# Altium PCB SingleSupplyAudioAmp.PcbDoc
Units mm, origin at the board's own origin, x right, y up, seen from the top; angles counter-clockwise.
Board outline 40 x 60 mm, 2 copper layers (Top Layer, Bottom Layer); 81 components, 45 nets, 222 pads, 418 vias.
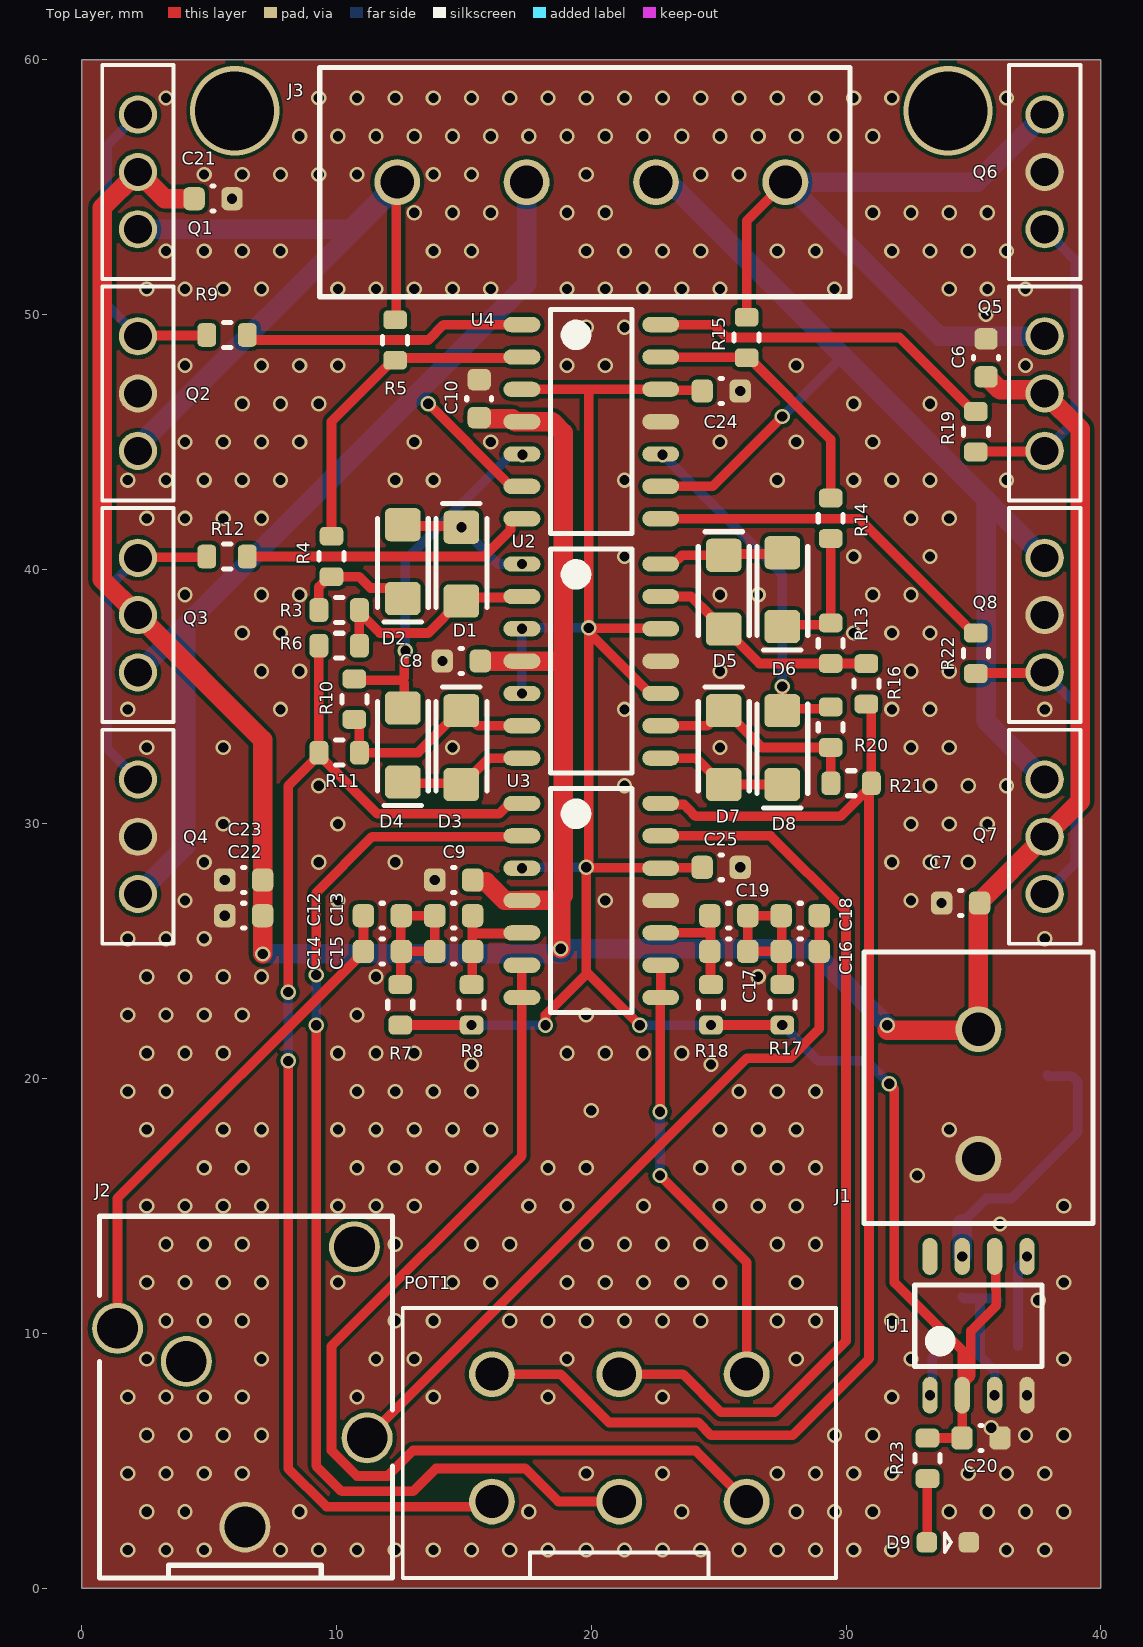
[diagram p0: Top Layer view]
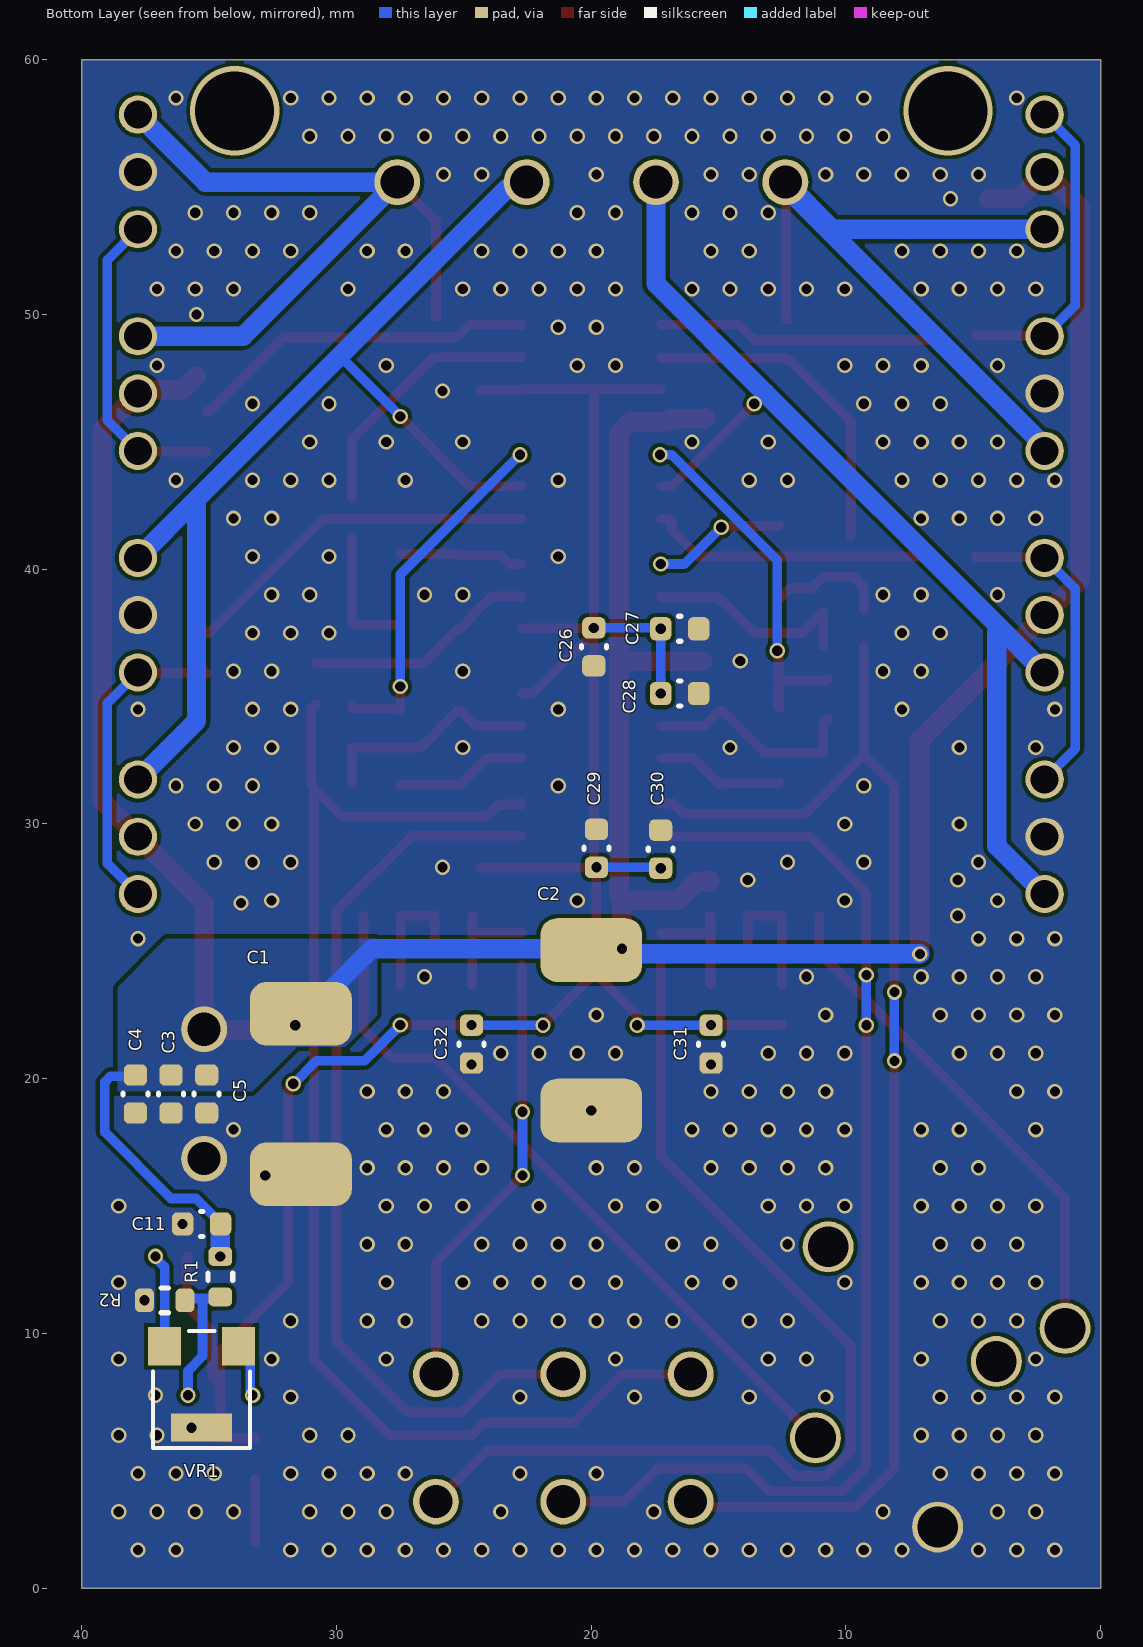
[diagram p1: Bottom Layer view, seen from below]
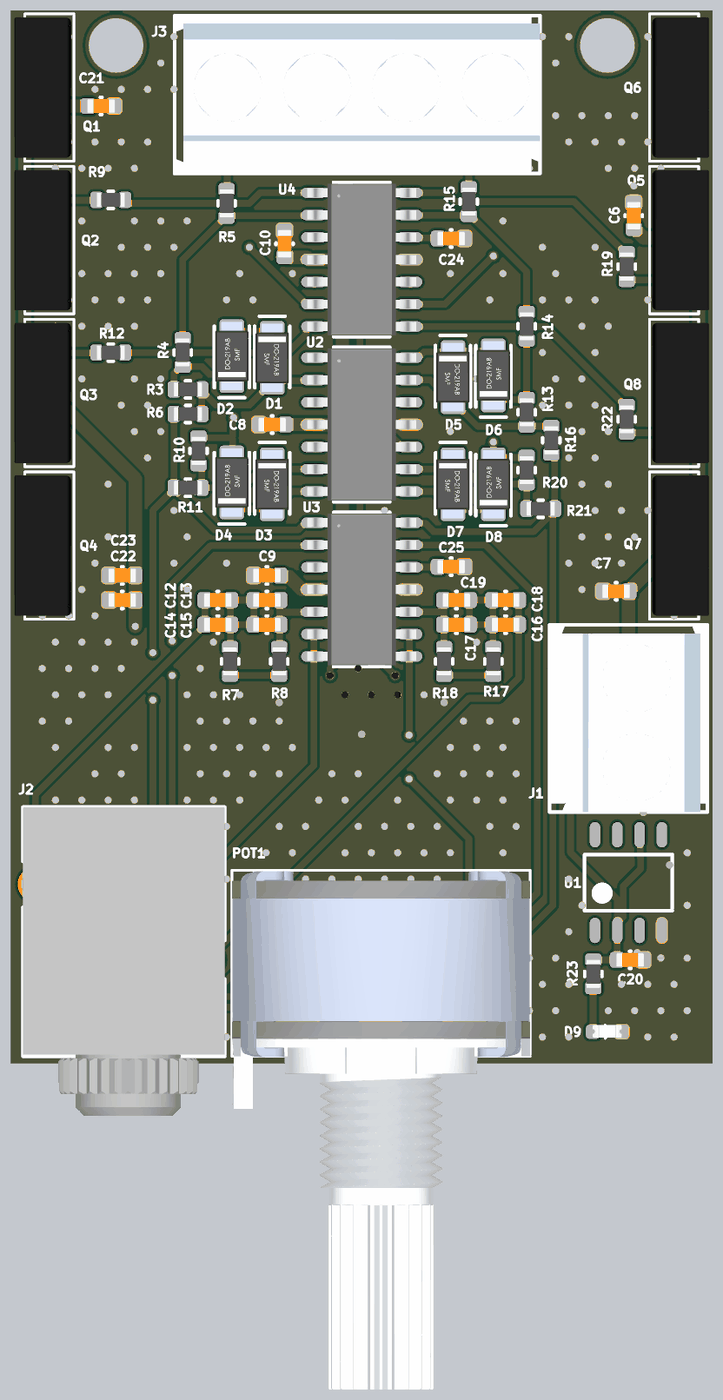
[diagram p2: 3D render of the assembled board from above, using the file's embedded part models]
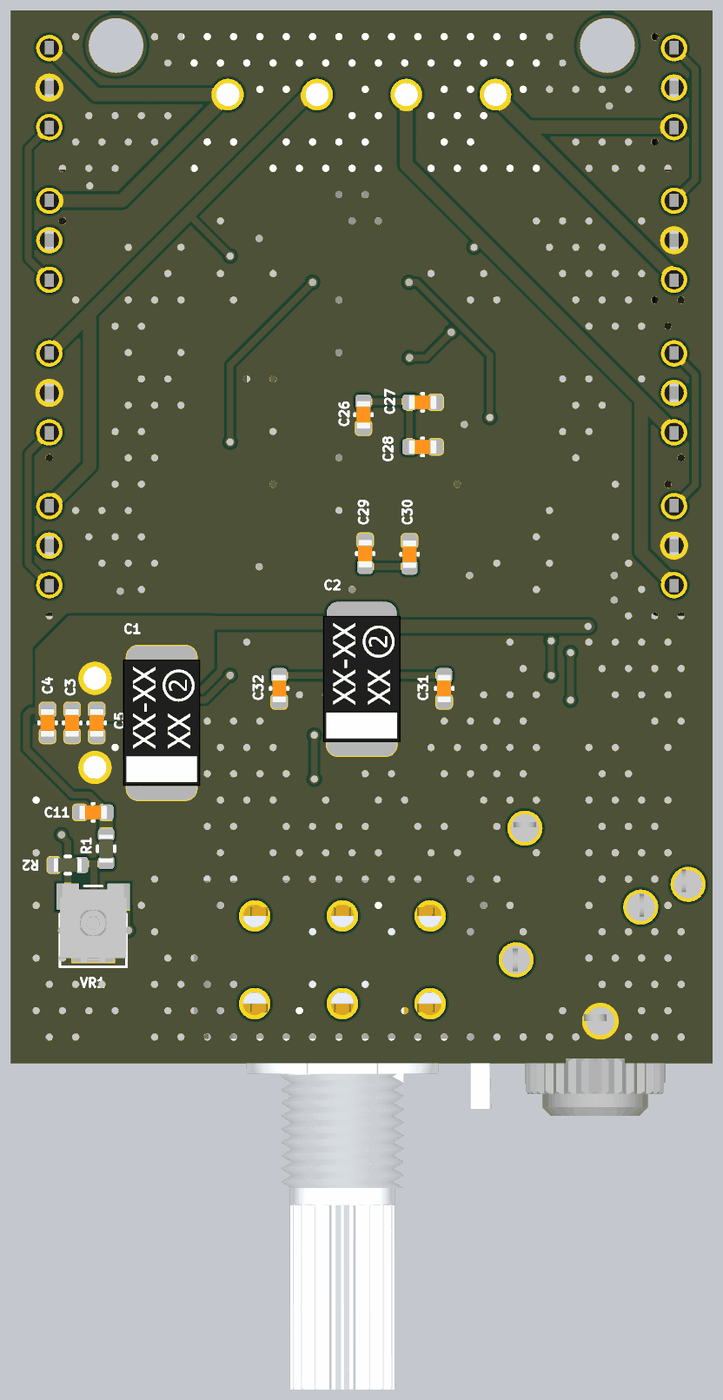
[diagram p3: 3D render of the assembled board from below, using the file's embedded part models]

## Layer stack, top to bottom
Top Solder: solder mask 0.0102, Solder Resist, Dk 3.5
Top Layer: signal copper 0.0356
Dielectric 1: dielectric 0.32, FR-4, Dk 4.8
Bottom Layer: signal copper 0.0356
Bottom Solder: solder mask 0.0102, Solder Resist, Dk 3.5

## Board outline
0,0 0,60 40,60 40,0

## Design rules (kind name [scope] priority, off if disabled: settings)
Clearance [All] p1: gap=0.15 ignorepadtopadclearanceinfootprint=FALSE except(0: Arc-Hole Track-Hole SMDPad-Hole THPad-Hole Via-Hole Fill-Hole Poly-Hole Region-Hole Text-Hole)
Height [All] p1: minheight=0 maxheight=35 prefheight=12.7
HoleSize [All] p1: absolutevalues=TRUE maxlimit=6.3 minlimit=0.2 maxpercent=80.000 minpercent=20.000
MinimumSolderMaskSliver [All] p1: minsoldermaskwidth=0.15
PlaneConnect [All] p1: planeconnectstyle=Direct reliefexpansion=0.508 reliefentries=4 reliefconductorwidth=0.254 reliefairgap=0.254
PolygonConnect [All] p1: connectstyle=Direct reliefconductorwidth=0.254 reliefentries=4 polygonreliefangle="90 Angle" airgapwidth=0.254
RoutingVias [All] p1: holewidth=0.6 width=0.35 viastyle="Through Hole" minholewidth=0.35 minwidth=0.3 maxholewidth=1.7 maxwidth=1.5
SilkToSilkClearance [All] p1: silktosilkclearance=0.15
SilkToSolderMaskClearance [IsPad] p1: minsilkscreentomaskgap=0.08 clearancetoexposedcopper=TRUE
SolderMaskExpansion [All] p1: expansion=0.045 istentingtop=FALSE
Width [All] p1: maxlimit=1.524 minlimit=0.203 preferedwidth=0.254 minimp=50.000000 maximp=50.000000 favimp=50.000000
24 further rules are at their usual default settings.

## Components (designator, comment, footprint, x,y, rotation, side; value= is the part's Value field where it differs from the comment)
C1 "100u" C_TR3D 31.4,19.4 r90 bottom
C2 "100u" C_TR3D 20,21.9 r90 bottom
C3 "100n" C0603_N 36.5,19.4 r270 bottom
C4 "100n" C0603_N 37.9,19.4 r270 bottom
C5 "100n" C0603_N 35.1,19.4 r270 bottom
C6 "100n" C0603_N 35.5,48.3 r90 top
C7 "100n" C0603_N 34.5,26.9 r180 top
C8 "100n" C0603_N 14.9,36.4 r180 top
C9 "100n" C0603_N 14.6,27.8 r180 top
C10 "100n" C0603_N 15.6,46.7 r90 top
C11 "100n" C0603_N 35.3,14.3 r0 bottom
C12 "100n" C0603_N 11.8,26.4 r0 top
C13 "100n" C0603_N 14.6,26.4 r0 top
C14 "100n" C0603_N 11.8,25 r0 top
C15 "100n" C0603_N 14.6,25 r0 top
C16 "100n" C0603_N 28.2,25 r180 top
C17 "100n" C0603_N 25.4,25 r180 top
C18 "100n" C0603_N 28.2,26.4 r180 top
C19 "100n" C0603_N 25.4,26.4 r180 top
C20 "100n" C0603_N 35.3,5.9 r0 top
C21 "100n" C0603_N 5.15,54.55 r0 top
C22 "100n" C0603_N 6.355,26.4 r180 top
C23 "100n" C0603_N 6.355,27.8 r180 top
C24 "100n" C0603_N 25.1,47 r0 top
C25 "100n" C0603_N 25.1,28.3 r0 top
C26 "100n" C0603_N 19.9,36.955 r270 bottom
C27 "100n" C0603_N 16.53,37.665 r180 bottom
C28 "100n" C0603_N 16.53,35.125 r180 bottom
C29 "100n" C0603_N 19.8,29.045 r90 bottom
C30 "100n" C0603_N 17.275,29.01 r90 bottom
C31 "100n" C0603_N 15.3,21.36 r270 bottom
C32 "100n" C0603_N 24.7,21.36 r270 bottom
D1 "DIODE" DO-219AB 14.9,40.2 r270 top
D2 "DIODE" DO-219AB 12.6,40.3 r90 top
D3 "DIODE" DO-219AB 14.9,33 r270 top
D4 "DIODE" DO-219AB 12.6,33.1 r90 top
D5 "DIODE" DO-219AB 25.2,39.1 r270 top
D6 "DIODE" DO-219AB 27.5,39.2 r90 top
D7 "DIODE" DO-219AB 25.2,33 r270 top
D8 "DIODE" DO-219AB 27.5,33 r90 top
D9 "LED" LED_0603 34,1.8 r0 top
J1 "" TERM_BLOCK_2x1 35.2,19.4 r270 top
J2 "JACK_STEREO" "1503 09" 6.4,0.4 r0 top
J3 "SOCHDR_4X1" TERM_BLOCK_4x1 20,55.2 r0 top
POT1 "RES_POT_S" POT_STEREO 21.1,5.9 r180 top
Q1 "BD681" TO-126 2.2,55.6 r90 top
Q2 "BD682" TO-126 2.2,46.9 r90 top
Q3 "BD681" TO-126 2.2,38.2 r90 top
Q4 "BD682" TO-126 2.2,29.5 r90 top
Q5 "BD681" TO-126 37.8,46.9 r270 top
Q6 "BD682" TO-126 37.8,55.6 r270 top
Q7 "BD681" TO-126 37.8,29.5 r270 top
Q8 "BD682" TO-126 37.8,38.2 r270 top
R1 "1k" R0603_N 34.565,12.23 r270 bottom
R2 "1k" R0603_N 36.75,11.3 r0 bottom
R3 "1k" R0603_N 10.1,38.4 r180 top
R4 "1k" R0603_N 9.8,40.505 r90 top
R5 "1k" R0603_N 12.3,49 r90 top
R6 "1k" R0603_N 10.1,37 r0 top
R7 "RES" R0603_N 12.5,22.9 r270 top
R8 "RES" R0603_N 15.3,22.9 r270 top
R9 "100" R0603_N 5.7,49.2 r180 top
R10 "1k" R0603_N 10.7,34.9 r90 top
R11 "1k" R0603_N 10.1,32.8 r0 top
R12 "100" R0603_N 5.7,40.5 r180 top
R13 "1k" R0603_N 29.4,37.1 r90 top
R14 "1k" R0603_N 29.4,42 r90 top
R15 "1k" R0603_N 26.1,49.1 r90 top
R16 "1k" R0603_N 30.8,35.5 r90 top
R17 "RES" R0603_N 27.5,22.9 r270 top
R18 "RES" R0603_N 24.7,22.9 r270 top
R19 "100" R0603_N 35.1,45.4 r270 top
R20 "1k" R0603_N 29.4,33.8 r90 top
R21 "1k" R0603_N 30.2,31.6 r180 top
R22 "100" R0603_N 35.1,36.7 r270 top
R23 "1k" R0603_N 33.2,5.095 r270 top
U1 "uA741" SOIC-8 35.2,10.3 r90 top
U2 "ADA4610-4" SOIC-14 20,36.4 r0 top
U3 "ADA4610-4" SOIC-14 20,27 r0 top
U4 "ADA4610-4" SOIC-14 20,45.8 r0 top
VR1 "=Value" POT_3364W 35.3,7.8 r0 bottom

## Footprints (in the part's own frame and the unit in brackets; to place one, negate y for a bottom-side part, rotate by r counter-clockwise, add the part's x,y. Pads: shape width x height; smd on the part's side, far side on the other; paste and mask are expansions set on the pad)
"1503 09" [mm] "jack connector, 3.5mm"
  round 2 hole 1.6: 1(0,2) 2(-5,9.8) 3(4.8,5.5) 4(-2.3,8.5) 5(4.3,13)
  silkscreen extent -5.7,0 5.8,14.2, body extent -5.7,-3.4 5.8,14.2, height 7
C0603_N [mm] "Capacitor, Chip; 1.60 mm L X 0.80 mm W X 0.87 mm H body"
  rrect50% 0.84x0.91 smd: 1(-0.745,0) 2(0.745,0)
  silkscreen extent -0.05,-0.49 0.05,0.49, body extent -0.8,-0.4 0.8,0.4, height 0.87
C_TR3D [mm] "Capacitor, 7.3 mm L X 4.3 mm W X 2.8 mm H body"
  rrect52% 2.5x4 smd: N(-3.15,0) P(3.15,0)
  body extent -3.59,-2.21 3.6,2.21, height 2.93
DO-219AB [mm] "SMA"
  rrect30% 1.3x1.4 smd: A(1.45,0) C(-1.45,0)
  silkscreen extent -2.38,-1 1.7,1, body extent -1.95,-0.95 1.95,0.95, height 1.25
LED_0603 [mm] "LED, 0603"
  rrect50% 0.8x0.8 smd: A(-0.825,0) K(0.825,0)
  silkscreen extent -0.13,-0.38 0.13,0.38, body extent -0.83,-0.34 0.82,0.38, height 0.68
POT_3364W [mm] "3364W potentiometer"
  rect 1.3x1.5 smd: 1(1.45,-1.7) 3(-1.45,-1.7)
  rect 2.4x1.1 smd: 2(0,1.5)
  silkscreen extent -1.9,-2.3 1.9,2.3, body extent -1.9,-2.43 1.9,2.07, height 1.01
POT_STEREO [mm] "Stereo Potentio meter, 6mm axis"
  round 1.8 hole 1.3: 1(-5,2.5) 2(0,2.5) 3(5,2.5) 4(-5,-2.5) 5(0,-2.5) 6(5,-2.5)
  silkscreen extent -8.5,-5.1 8.5,5.5, body extent -8.5,-5.05 8.5,24.5, height 21.5
R0603_N [mm] "Resistor, Chip; 1.60 mm L X 0.80 mm W X 0.55 mm H body"
  rrect51% 0.74x0.93 smd: 1(-0.795,0) 2(0.795,0)
  silkscreen extent -0.15,-0.49 0.15,0.49, body extent -0.8,-0.4 0.8,0.4, height 0.55
SOIC-8 [mm] "SOIC, 8-Leads, Body 4.90x3.90mm, Pitch 1.27mm, IPC Medium Density"
  oval 1.45x0.6 smd: 1(-2.725,1.905) 2(-2.725,0.635) 3(-2.725,-0.635) 4(-2.725,-1.905) 5(2.725,-1.905) 6(2.725,-0.635) 7(2.725,0.635) 8(2.725,1.905)
  silkscreen extent -1.6,-2.5 1.6,2.5, body extent -2,-2.5 2,2.5, height 1.75
SOIC-14 [mm] "SOIC, 14-Leads"
  oval 1.45x0.6 smd: 1(-2.725,3.805) 2(-2.725,2.535) 3(-2.725,1.265) 4(-2.725,-0.005) 5(-2.725,-1.275) 6(-2.725,-2.545) 7(-2.725,-3.815) 8(2.725,-3.815) 9(2.725,-2.545) 10(2.725,-1.275) 11(2.725,-0.005) 12(2.725,1.265) 13(2.725,2.535) 14(2.725,3.805)
  silkscreen extent -1.6,-4.4 1.6,4.4, body extent -3.1,-4.32 3.1,4.33, height 1.75
TERM_BLOCK_2x1 [mm] "TERMINAL BLOCK, TE CONNECTIVITY 282841-2"
  round 1.8 hole 1.3: 1(2.54,0) 2(-2.54,0)
  silkscreen extent -5.58,-4.5 5.08,4.5, body extent -5.58,-4.5 5.08,4.5, height 15.2
TERM_BLOCK_4x1 [mm] "TERMINAL BLOCK, TE CONNECTIVITY 282841-4"
  round 1.8 hole 1.3: 1(-7.62,0) 2(-2.54,0) 3(2.54,0) 4(7.62,0)
  silkscreen extent -10.66,-4.5 10.16,4.5, body extent -10.66,-4.55 10.16,4.45, height 15.2
TO-126 [mm] "TO-126"
  round 1.5 hole 1.1: B(2.25,0) C(0,0) E(-2.25,0)
  silkscreen extent -4.2,-1.4 4.2,1.4, body extent -4,-1.25 4,2, height 24.94

## Part data
C1 C2: library part CAP_POL, RevS="$Rev:: 58        $"
C3 C4 C5 C6 C7 C8 C9 C10 C11 C12 C13 C14 C15 C16 C17 C18 C19 C20 C21 C22 C23 C24 C25 C26 C27 C28 C29 C30 C31 C32: library part CAP, RevS="$Rev:: 58        $"
J1: library part SOCHDR_2X1, "Socket", ComponentLink1Description=Manufacturer, ComponentLink1URL=http://www.we-online.de, ComponentLink2Description=Datasheet, ComponentLink2URL=http://katalog.we-online.de/em/datasheet/691412320002.pdf
J2: "3,5mm Stereo Jack connector, Lumberg 1503 09 type"
J3: "Socket", ComponentLink1Description=Manufacturer, ComponentLink1URL=http://www.we-online.de, ComponentLink2Description=Datasheet, ComponentLink2URL=http://katalog.we-online.de/em/datasheet/691412320002.pdf
POT1: "Stereo"
Q1 Q3 Q5 Q7: library part BJT_NPN
Q2 Q4 Q6 Q8: library part BJT_PNP
R1 R2 R3 R4 R5 R6 R9 R10 R11 R12 R13 R14 R15 R16 R19 R20 R21 R22 R23: library part RES
U1: "Rail-to-Rail, 90uV Vos, Precision op. amp."
U2 U3 U4: "Dual op. amp., Rail-to-Rail"
VR1: library part RES_POT_M, "Mono"

## Via types
v1: diameter 0.6, hole 0.4, Top Layer to Bottom Layer, tented both sides, 416 vias
v2: diameter 3.5, hole 3.1, Top Layer to Bottom Layer, tented both sides, 2 vias

## Nets (pads, with @x,y where several pads share a name; then routed paths per layer and width w, separated by ;. In a path a pad name is that pad's centre, name@x,y a point inside that pad or via, vN(x,y) a via of type N, cw(c..) or ccw(c..) an arc to the next point about the centre after c; other vN are vias at no path point)
GND: C1.N C2.N C3.2 C4.2 C5.2 C6.2 C7.2 C8.2 C9.2 C10.2 C11.2 C20.2 C21.2 C22.2 C23.2 C24.2 C25.2 C26.2 C27.2 C28.2 C29.2 C30.2 C31.2 C32.2 D9.K J1.1 J2.1 Q2.C Q4.C Q6.C Q8.C R2.2 U1.4 U2.11 U3.11 U4.11 VR1.2
  other v1: 1.8,1.5 3.3,1.5 4.8,1.5 7.8,1.5 9.3,1.5 10.8,1.5 12.3,1.5 13.8,1.5 15.3,1.5 16.8,1.5 18.3,1.5 19.8,1.5 21.3,1.5 22.8,1.5 24.3,1.5 25.8,1.5 27.3,1.5 28.8,1.5 30.3,1.5 31.8,1.5 36.3,1.5 37.8,1.5 2.55,3 4.05,3 8.55,3 17.55,3 23.55,3 28.05,3 29.55,3 31.05,3 34.05,3 35.55,3 37.05,3 38.55,3 1.8,4.5 3.3,4.5 4.8,4.5 6.3,4.5 19.8,4.5 22.8,4.5 27.3,4.5 28.8,4.5 30.3,4.5 31.8,4.5 34.8,4.5 36.3,4.5 37.8,4.5 2.55,6 4.05,6 5.55,6 7.05,6 29.55,6 31.05,6 37.05,6 38.55,6 35.7,6.3 1.8,7.5 3.3,7.5 4.8,7.5 6.3,7.5 10.8,7.5 13.8,7.5 18.3,7.5 22.8,7.5 31.8,7.5 37.105,7.575 2.55,9 7.05,9 11.55,9 13.05,9 19.05,9 28.05,9 32.55,9 38.55,9 3.3,10.5 4.8,10.5 6.3,10.5 12.3,10.5 13.8,10.5 16.8,10.5 18.3,10.5 19.8,10.5 21.3,10.5 22.8,10.5 24.3,10.5 27.3,10.5 28.8,10.5 31.8,10.5 37.545,11.3 2.55,12 4.05,12 5.55,12 7.05,12 10.05,12 14.55,12 16.05,12 19.05,12 20.55,12 22.05,12 23.55,12 25.05,12 28.05,12 38.55,12 3.3,13.5 4.8,13.5 6.3,13.5 12.3,13.5 15.3,13.5 16.8,13.5 19.8,13.5 21.3,13.5 22.8,13.5 24.3,13.5 27.3,13.5 28.8,13.5 36.045,14.3 2.55,15 4.05,15 5.55,15 7.05,15 10.05,15 11.55,15 13.05,15 17.55,15 19.05,15 22.05,15 25.05,15 26.55,15 28.05,15 38.55,15 32.8,16.2 4.8,16.5 6.3,16.5 10.8,16.5 12.3,16.5 13.8,16.5 15.3,16.5 18.3,16.5 19.8,16.5 24.3,16.5 25.8,16.5 27.3,16.5 28.8,16.5 2.55,18 5.55,18 7.05,18 10.05,18 11.55,18 13.05,18 14.55,18 16.05,18 25.05,18 26.55,18 28.05,18 34.05,18 20,18.75 1.8,19.5 3.3,19.5 10.8,19.5 12.3,19.5 13.8,19.5 15.3,19.5 25.8,19.5 27.3,19.5 28.8,19.5 15.3,20.56 24.7,20.56 2.55,21 4.05,21 5.55,21 10.05,21 11.55,21 13.05,21 19.05,21 20.55,21 22.05,21 23.55,21 1.8,22.5 3.3,22.5 4.8,22.5 6.3,22.5 10.8,22.5 19.8,22.5 2.55,24 4.05,24 5.55,24 7.05,24 11.55,24 26.55,24 1.8,25.5 3.3,25.5 4.8,25.5 37.8,25.5 5.61,26.4 33.755,26.9 4.05,27 10.05,27 20.55,27 32.55,27 5.61,27.8 13.855,27.8 25.845,28.3 4.8,28.5 9.3,28.5 12.3,28.5 31.8,28.5 33.3,28.5 34.8,28.5 5.55,30 10.05,30 32.55,30 34.05,30 35.55,30 9.3,31.5 21.3,31.5 33.3,31.5 34.8,31.5 36.3,31.5 2.55,33 5.55,33 14.55,33 25.05,33 32.55,33 34.05,33 1.8,34.5 7.8,34.5 21.3,34.5 31.8,34.5 33.3,34.5 37.8,34.5 7.05,36 8.55,36 25.05,36 32.55,36 34.05,36 14.155,36.4 6.3,37.5 7.8,37.5 30.3,37.5 31.8,37.5 33.3,37.5 4.05,39 7.05,39 8.55,39 25.05,39 26.55,39 31.05,39 32.55,39 21.3,40.5 30.3,40.5 33.3,40.5 2.55,42 4.05,42 5.55,42 7.05,42 32.55,42 34.05,42 1.8,43.5 3.3,43.5 4.8,43.5 6.3,43.5 7.8,43.5 12.3,43.5 13.8,43.5 21.3,43.5 27.3,43.5 30.3,43.5 31.8,43.5 33.3,43.5 36.3,43.5 4.05,45 5.55,45 7.05,45 8.55,45 13.05,45 16.05,45 25.05,45 28.05,45 31.05,45 6.3,46.5 7.8,46.5 9.3,46.5 30.3,46.5 33.3,46.5 25.845,47 4.05,48 7.05,48 8.55,48 10.05,48 19.05,48 20.55,48 28.05,48 37.05,48 19.8,49.5 21.3,49.5 35.5,50 2.55,51 4.05,51 5.55,51 7.05,51 10.05,51 11.55,51 13.05,51 14.55,51 16.05,51 19.05,51 20.55,51 22.05,51 23.55,51 25.05,51 29.55,51 34.05,51 35.55,51 37.05,51 3.3,52.5 4.8,52.5 6.3,52.5 7.8,52.5 13.8,52.5 15.3,52.5 19.8,52.5 21.3,52.5 22.8,52.5 24.3,52.5 27.3,52.5 28.8,52.5 31.8,52.5 33.3,52.5 34.8,52.5 36.3,52.5 13.05,54 14.55,54 16.05,54 19.05,54 20.55,54 31.05,54 32.55,54 34.05,54 35.55,54 5.895,54.55 4.8,55.5 6.3,55.5 7.8,55.5 9.3,55.5 10.8,55.5 13.8,55.5 15.3,55.5 19.8,55.5 24.3,55.5 25.8,55.5 8.55,57 10.05,57 11.55,57 13.05,57 14.55,57 16.05,57 17.55,57 19.05,57 20.55,57 22.05,57 23.55,57 25.05,57 26.55,57 28.05,57 29.55,57 31.05,57 3.3,58.5 9.3,58.5 10.8,58.5 12.3,58.5 13.8,58.5 15.3,58.5 16.8,58.5 18.3,58.5 19.8,58.5 21.3,58.5 22.8,58.5 24.3,58.5 25.8,58.5 27.3,58.5 28.8,58.5 30.3,58.5 31.8,58.5 36.3,58.5
IN_1: C12.1 C14.1 J2.2 | length 20.2
  Top Layer w0.381: J2.2 1.4,15.31 11.055,24.965 C14.1 C12.1
IN_2: C16.1 C18.1 J2.3 | length 28.8
  Top Layer w0.381: J2.3 26.1,20.8 27.8,20.8 28.945,21.945 C16.1 C18.1
NetC12_2: C12.2 C13.1 C14.2 C15.1 R7.1 | length 6.7
  Top Layer w0.381: R7.1 12.523,23.718 12.523,26.377 C12.2 C13.1 C15.1 C14.2
NetC13_2: C13.2 C15.2 R8.1 U3.5 | length 5.4
  Top Layer w0.381: R8.1 15.323,23.718 15.323,26.377 C13.2 15.345,25.7 17.25,25.7 U3.5
NetC16_2: C16.2 C17.1 C18.2 C19.1 R17.1 | length 6.7
  Top Layer w0.381: C16.2 C17.1 C19.1 C18.2 27.477,26.378 27.477,23.718 R17.1
NetC17_2: C17.2 C19.2 R18.1 U3.10 | length 5.3
  Top Layer w0.381: U3.10 24.63,25.725 ; 24.655,25.7 C19.2 24.677,26.378 24.677,23.717 R18.1
NetD1_A: D1.A R3.1 R6.2 U2.2 | length 8.6
  Top Layer w0.381: R6.2 10.895,38.305 11.7,37.5 13.6,37.5 14.85,38.75 D1.A 15.043,38.893 17.233,38.893 U2.2
NetD1_C: D1.C D2.A U2.1 | length 5.3
  Top Layer w0.381: D2.A 12.65,41.7 14.85,41.7 v1(14.9,41.65)
  Bottom Layer w0.381: v1(14.9,41.65) 16.345,40.205 v1(17.275,40.205)
NetD2_C: D2.C R3.2 R4.1 | length 4.7
  Top Layer w0.381: R3.2 9.305,39.31 9.705,39.71 R4.1 10.881,39.71 11.328,39.263 12.187,39.263 D2.C
NetD3_A: D3.A D4.C U2.7 | length 5.1
  Top Layer w0.381: D4.C 12.65,31.6 14.85,31.6 D3.A 14.948,31.55 15.709,32.312 15.709,32.316 15.978,32.585 U2.7
NetD3_C: D3.C R10.1 R11.2 U2.6 | length 8.7
  Top Layer w0.381: R10.1 10.715,34.105 10.895,33.925 R11.2 13.2,32.8 14.85,34.45 D3.C 14.952,34.45 15.547,33.855 U2.6
NetD4_A: D4.A R10.2 U4.5 | length 14.1
  Top Layer w0.381: R10.2 10.752,35.643 12.557,35.643 ; D4.A 12.652,34.602 12.652,35.548 12.557,35.643 ; v1(12.7,36.8) 12.658,36.758 12.658,36.603 12.652,36.597 12.652,35.738 12.557,35.643
  Bottom Layer w0.381: v1(12.7,36.8) 12.7,40.356 16.844,44.5 v1(17.3,44.5)
NetD5_A: D5.A R13.1 R16.2 U2.13 | length 9.2
  Top Layer w0.381: U2.13 23.915,38.935 24.693,38.157 24.693,38.109 25.152,37.65 D5.A 25.25,37.65 26.595,36.305 R13.1 29.405,36.3 30.795,36.3 R16.2
NetD5_C: D5.C D6.A U2.14 | length 5
  Top Layer w0.381: U2.14 23.209,40.205 23.554,40.55 D5.C 25.25,40.6 27.45,40.6 D6.A
NetD6_C: D6.C R13.2 R14.1 | length 5.3
  Top Layer w0.381: D6.C 27.573,37.822 29.328,37.822 R13.2 R14.1
NetD7_A: D7.A D8.C U2.8 | length 5.2
  Top Layer w0.381: U2.8 24.115,32.585 25.15,31.55 D7.A D8.C
NetD7_C: D7.C R20.1 R21.2 U2.9 | length 8.9
  Top Layer w0.381: U2.9 24.553,33.855 25.148,34.45 D7.C 25.25,34.45 26.695,33.005 R20.1 29.402,33.003 29.402,31.603 R21.2
NetD8_A: D8.A R20.2 U4.10 | length 14
  Top Layer w0.381: v1(27.5,35.4) D8.A 27.573,34.523 29.328,34.523 R20.2
  Bottom Layer w0.381: v1(22.8,44.5) 27.5,39.8 v1(27.5,35.4)
NetD9_A: D9.A R23.2 | length 2.5
  Top Layer w0.381: D9.A 33.188,1.812 33.188,4.287 R23.2
NetJ3_1: J3.1 Q1.E Q2.E R5.2 | length 31.2
  Top Layer w0.381: R5.2 12.34,49.835 12.34,55.16 J3.1
  Bottom Layer w0.762: Q2.E 2.2,44.835 12.38,55.015 J3.1 10.53,53.35 Q1.E
NetJ3_2: J3.2 Q3.E Q4.E U4.6 | length 42.5
  Top Layer w0.381: v1(13.6,46.5) 16.845,43.255 U4.6
  Bottom Layer w0.381: 13.175,46.925 v1(13.6,46.5)
  Bottom Layer w0.762: Q4.E 4.075,29.125 4.075,37.825 ; Q3.E 4.075,37.825 ; J3.2 17.46,51.21 13.175,46.925 4.075,37.825
NetJ3_3: J3.3 Q7.E Q8.E U4.9 | length 42.6
  Top Layer w0.381: U4.9 24.755,43.255 v1(27.5,46)
  Bottom Layer w0.381: v1(27.5,46) 29.875,48.375
  Bottom Layer w0.762: J3.3 22.739,55.001 23.249,55.001 29.875,48.375 35.5,42.75 ; Q7.E 35.5,34.05 35.5,42.75 ; Q8.E 35.5,42.75
NetJ3_4: J3.4 Q5.E Q6.E R15.2 | length 29.9
  Top Layer w0.381: R15.2 26.1,53.68 J3.4
  Bottom Layer w0.762: Q5.E 33.67,49.15 J3.4 35.15,55.2 Q6.E
NetPOT1_1: POT1.1 U3.6 U3.7 | length 40.1
  Top Layer w0.381: U3.6 U3.7 17.275,16.975 9.8,9.5 9.8,5.4 10.8,4.4 12,4.4 13,5.4 24.1,5.4 POT1.1
NetPOT1_2: POT1.2 U3.2 | length 44.7
  Top Layer w0.381: v1(9.2,22.1) 9.2,4.8 10.2,3.8 13,3.8 13.9,4.7 17.408,4.7 18.708,3.4 POT1.2 ; v1(9.2,24.069) 9.2,27.3 11.4,29.5 17.24,29.5 U3.2
  Bottom Layer w0.381: v1(9.2,22.1) v1(9.2,24.069)
NetPOT1_3: POT1.3 R6.1 R11.1 U3.1 | length 50.6
  Top Layer w0.381: v1(8.1,20.7) 8.1,4.7 9.6,3.2 15.9,3.2 POT1.3 ; v1(8.1,23.4) 8.1,31.5 R11.1@9.305,32.705 ; R6.1 R11.1 R11.1@9.305,32.705 ; U3.1 16.791,30.805 16.386,30.4 11.61,30.4 R11.1@9.305,32.705
  Bottom Layer w0.381: v1(8.1,20.7) v1(8.1,23.4)
NetPOT1_4: POT1.4 U3.8 U3.9 | length 17.5
  Top Layer w0.381: v1(22.7,16.2) 26.1,12.8 POT1.4 ; v1(22.7,18.7) 22.712,18.713 22.712,23.172 U3.8 U3.9
  Bottom Layer w0.381: v1(22.7,16.2) v1(22.7,18.7)
NetPOT1_5: POT1.5 U3.13 | length 36.1
  Top Layer w0.381: POT1.5 23.592,8.4 25.092,6.9 27.2,6.9 30,9.7 30,26.579 27.044,29.535 U3.13
NetPOT1_6: POT1.6 R16.1 R21.1 U3.14 | length 51.7
  Top Layer w0.381: POT1.6 18.792,8.4 20.692,6.5 24.2,6.5 24.7,6 27.9,6 30.9,9 R21.1@30.9,31.41 ; U3.14 22.767,30.763 23.637,30.763 23.8,30.6 24.1,30.3 29.79,30.3 R21.1@30.9,31.41 ; R16.1 30.815,34.705 30.995,34.525 R21.1 30.9,31.505 R21.1@30.9,31.41
NetQ1_B: Q1.B Q2.B R9.2 | length 12.5
  Top Layer w0.381: Q2.B 2.225,49.175 4.88,49.175 R9.2 R9.2@4.88,49.225
  Bottom Layer w0.381: Q1.B 1,56.65 1,50.35 Q2.B Q2.B@2.225,49.175
NetQ3_B: Q3.B Q4.B R12.2 | length 12.4
  Top Layer w0.381: Q3.B 2.225,40.475 4.88,40.475 R12.2
  Bottom Layer w0.381: Q4.B 1,32.95 1,39.25 Q3.B
NetQ5_B: Q5.B Q6.B R19.2 | length 12.4
  Top Layer w0.381: R19.2 35.123,44.628 37.778,44.628 Q5.B
  Bottom Layer w0.381: Q5.B 39,45.85 39,52.15 Q6.B
NetQ7_B: Q7.B Q8.B R22.2 | length 12.4
  Top Layer w0.381: R22.2 35.123,35.927 37.778,35.927 Q8.B
  Bottom Layer w0.381: Q7.B 39,28.45 39,34.75 Q8.B
NetR1_2: R1.2 R2.1 U1.3 | length 5.5
  Bottom Layer w0.381: R1.2 34.632,11.368 35.26,11.368 ; v1(35.835,7.575) 35.835,8.533 35.26,9.108 35.26,11.368 ; R2.1 35.887,11.368 35.26,11.368
NetR4_2: R4.2 R5.1 U4.2 | length 13
  Top Layer w0.381: R4.2 9.8,45.8 12.205,48.205 R5.1 12.388,48.293 17.233,48.293 U4.2
NetR9_1: R9.1 U4.1 | length 11.1
  Top Layer w0.381: R9.1 6.495,49.18 6.675,49 13.6,49 14.205,49.605 U4.1
NetR12_1: R12.1 U4.7 | length 11.6
  Top Layer w0.381: R12.1 15.79,40.5 16.827,41.537 16.827,41.884 16.928,41.985 U4.7
NetR14_2: R14.2 R15.1 U4.13 | length 10.3
  Top Layer w0.381: U4.13 22.74,48.32 26.085,48.32 R15.1 26.195,48.305 29.4,45.1 R14.2
NetR19_1: R19.1 U4.14 | length 13.8
  Top Layer w0.381: U4.14 24.795,49.605 25.3,49.1 32.1,49.1 35.005,46.195 R19.1
NetR22_1: R22.1 U4.8 | length 14.2
  Top Layer w0.381: U4.8 30.515,41.985 35.005,37.495 R22.1
NetU1_1: U1.1 VR1.3 | length 2.2
  Bottom Layer w0.381: v1(33.295,7.575) 33.295,7.634 33.39,7.73 33.39,9.04 VR1.3
NetU1_5: U1.5 VR1.1 | length 3.7
  Bottom Layer w0.381: VR1.1 36.75,12.611 37.105,12.966 v1(37.105,13.025)
VCC: C1.P C2.P C3.1 C4.1 C5.1 C6.1 C7.1 C8.1 C9.1 C10.1 C11.1 C21.1 C22.1 C23.1 J1.2 Q1.C Q3.C Q5.C Q7.C R1.1 U1.7 U2.4 U3.4 U4.4 | length 137.2
  Top Layer w0.762: C21.1 3.25,54.55 Q1.C 0.8,54.2 0.8,39.6 Q3.C 7.1,33.3 C23.1 C22.1 v1(7.1,24.9) ; C9.1 15.345,27.765 15.384,27.726 15.874,27.726 16.605,26.995 U3.4 17.28,27 18.7,27 ; C10.1@15.5,45.955 C10.1@15.539,45.916 ; C10.1@15.639,45.916 16.891,45.916 17.012,45.795 U4.4 17.28,45.8 18.454,45.8 18.9,45.354 18.9,36.277 ; C8.1 15.648,36.397 17.273,36.397 U2.4 18.782,36.395 18.9,36.277 ; v1(18.8,25.1) 18.8,26.9 18.7,27 ; v1@31.621,21.9 35.16,21.9 J1.2 35.2,26.9 Q7.C 39.2,30.9 39.2,45.5 Q5.C 37.659,47.041 36.049,47.041 35.535,47.555 C6.1 ; 18.7,27 18.9,27.2 18.9,36.277
  Bottom Layer w0.381: C11.1 34.555,14.335 35.52,15.3 36.5,15.3 39.1,17.9 39.1,19.877 38.877,20.1 37.945,20.1 C4.1
  Bottom Layer w0.762: v1(7.1,24.9) C2.P@18.8,24.9 ; v1(18.8,25.1) 28.621,25.1 v1(31.621,22.1) ; C11.1 34.565,14.29 v1(34.565,13.025)
VGND: C20.1 C24.1 C25.1 C26.1 C27.1 C28.1 C29.1 C30.1 C31.1 C32.1 R7.2 R8.2 R17.2 R18.2 R23.1 U1.2 U1.6 U2.3 U2.5 U2.10 U2.12 U3.3 U3.12 U4.3 U4.12 | length 93.4
  Top Layer w0.381: R7.2 v1(15.3,22.105) ; U4.3 20,47.065 ; v1(18.2,22.1) 18.2,22.5 19.8,24.1 19.8,24.2 ; v1(21.9,22.1) 19.8,24.2 ; U2.10 22.3,35.125 19.942,37.483 19.942,37.658 v1@19.918,37.683 ; U2.12 22.708,37.683 v1@19.918,37.683 ; C25.1 24.338,28.283 19.817,28.283 v1(19.8,28.3) ; C24.1 24.323,47.032 22.758,47.032 U4.12 20,47.065 ; v1(24.7,22.105) v1(27.5,22.105) ; v1(31.7,19.8) 31.9,19.6 31.9,12 34.565,9.335 U1.2@34.565,7.998 ; R23.1 33.205,5.895 34.55,5.895 C20.1 34.56,5.905 34.56,7.57 U1.2 U1.2@34.565,7.998 ; U1.6 35.877,12.983 35.877,11.737 35.9,11.714 35.9,11.1 34.9,10.1 34.9,8.333 U1.2@34.565,7.998 ; 19.8,24.2 v1(19.8,28.3) ; v1(19.8,28.3) 19.8,28.359 19.9,28.459 v1(19.9,37.7) ; v1(19.9,37.7) 19.9,46.965 20,47.065 ; v1(19.9,37.7) v1@19.918,37.683
  Bottom Layer w0.381: v1(15.3,22.105) 15.302,22.103 18.197,22.103 v1(18.2,22.1) ; v1(17.275,28.265) 17.31,28.3 v1(19.8,28.3) ; v1(17.275,35.125) v1(17.275,37.665) 17.31,37.7 v1(19.9,37.7) ; v1(21.9,22.1) 21.903,22.103 24.697,22.103 v1(24.7,22.105) ; v1(27.5,22.105) 28.905,20.7 30.8,20.7 v1(31.7,19.8)
pads on no net: J2.4 J2.5 U1.8
copper on no net:
  other v2: 6,58 34,58

## Polygon pours and split planes (outlines as drawn)
GND on Bottom Layer "Top Layer-No Net1" (solid, pour order 2): 0,0 0,60 40,60 40,0
VCC on Bottom Layer "NONET_L01_P-001" (solid, pour order 1): 38.6,19.5 33.3,19.5 31.549,21.251 29.647,21.251 29.647,21.253 28.4,22.5 28.4,25.5 36.7,25.5 38.6,23.6
GND on Top Layer "Top Layer-No Net" (solid, pour order 0): 0,0 0,60 40,60 40,0

## Silkscreen, mask and mechanical layers (free items; w line width, h text height)
Mechanical 1:
  the board outline again, w0.15